# Altium PCB PCB1.PcbDoc (part 1 of 2)
Units mm, origin at the board's own origin, x right, y up, seen from the top; angles counter-clockwise.
Board outline 65.4 x 65.4 mm, 4 copper layers (Top Layer, Internal Plane 1, Signal Layer 1, Bottom Layer), stack 0.778 mm thick; 79 components, 51 nets, 285 pads, 952 vias.
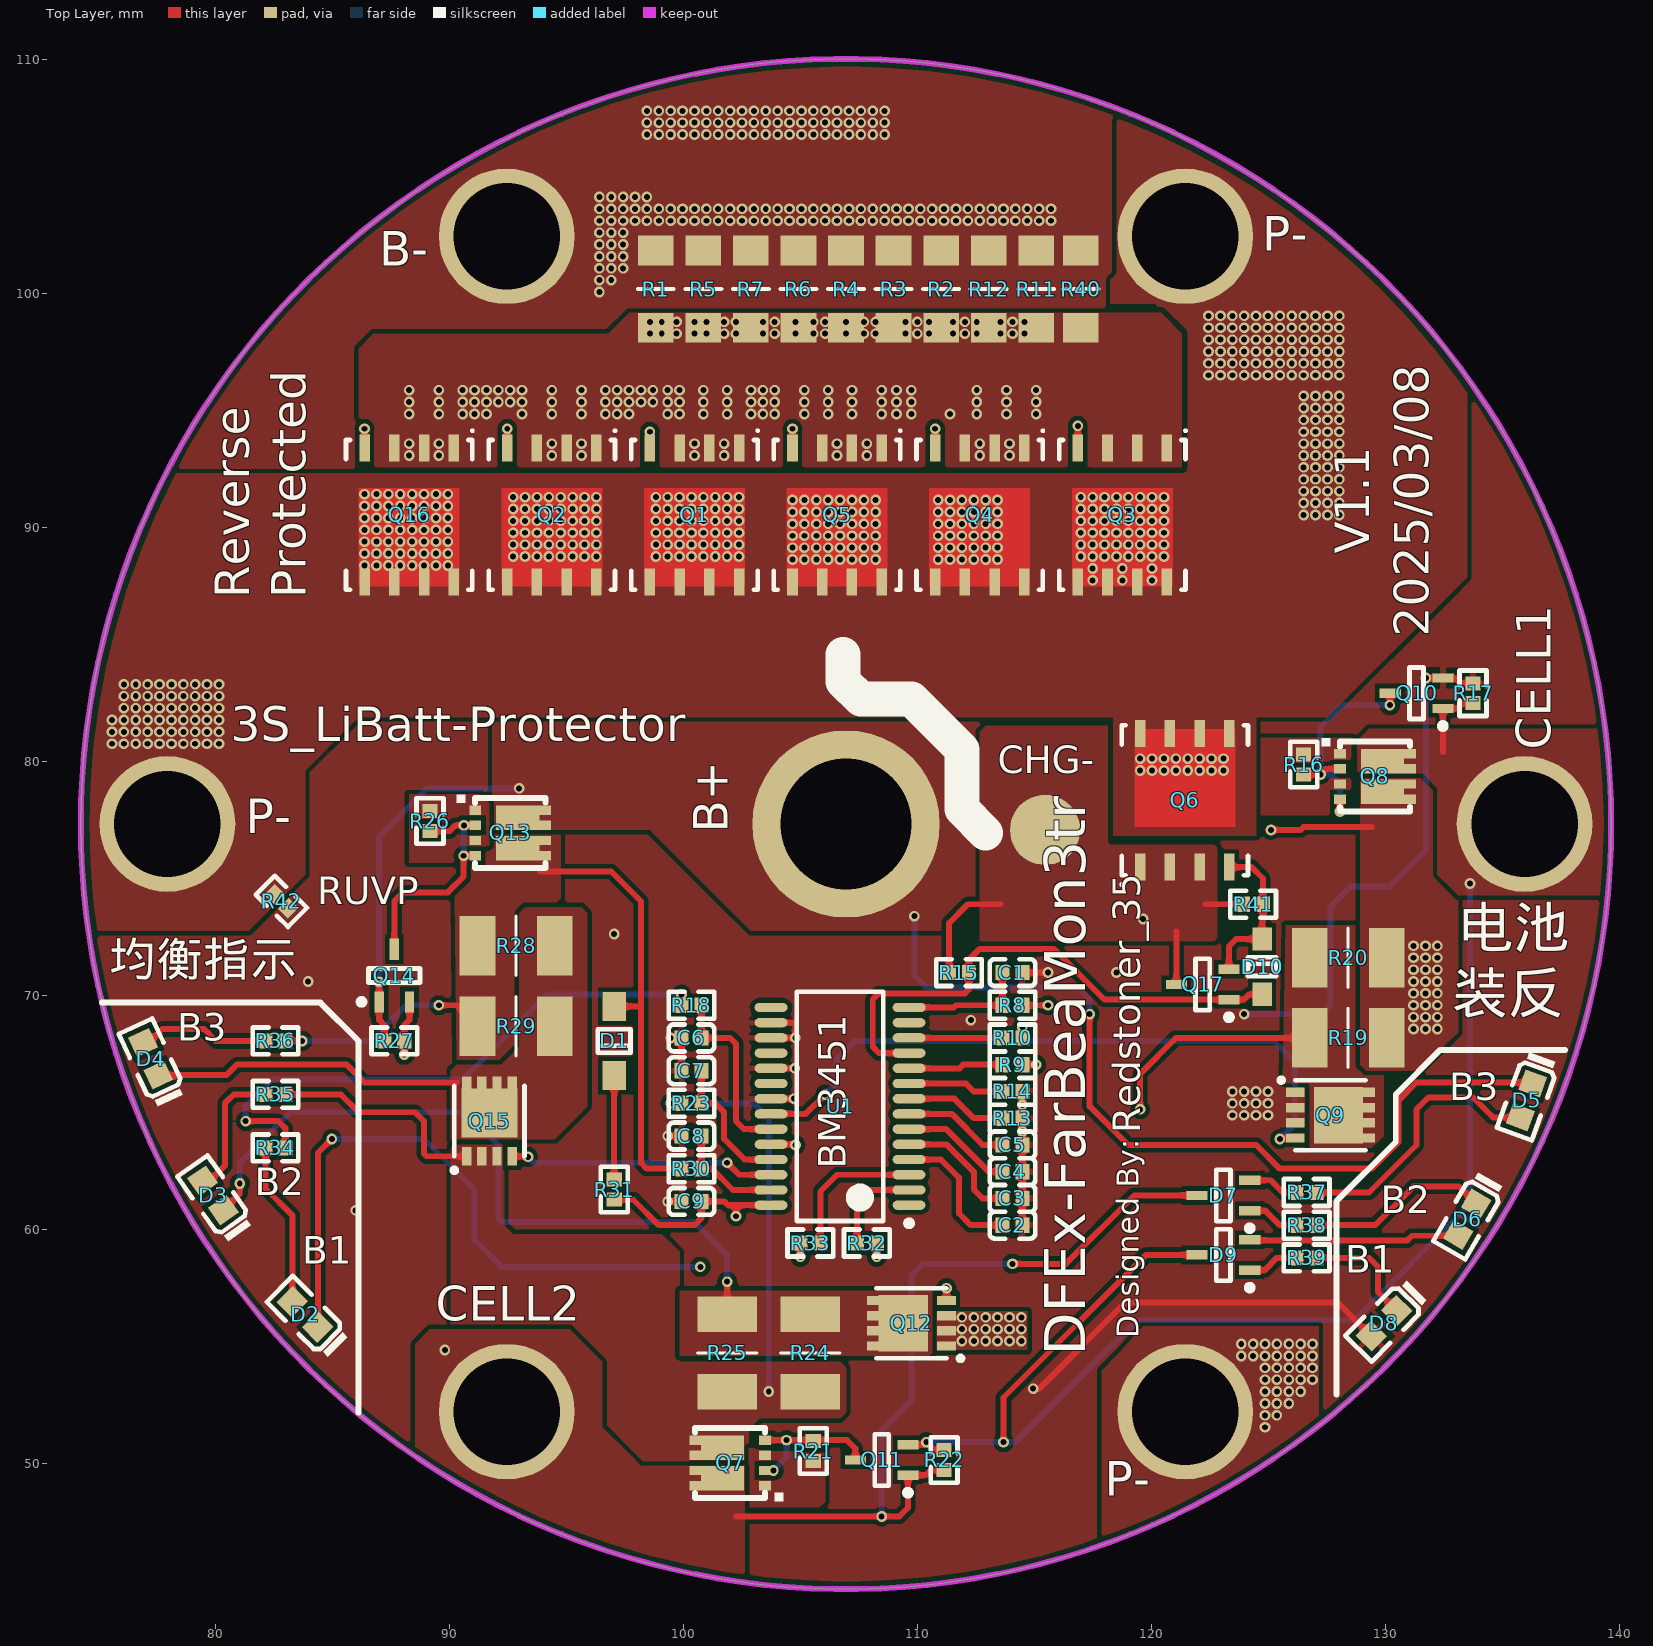
[diagram p0: Top Layer view]
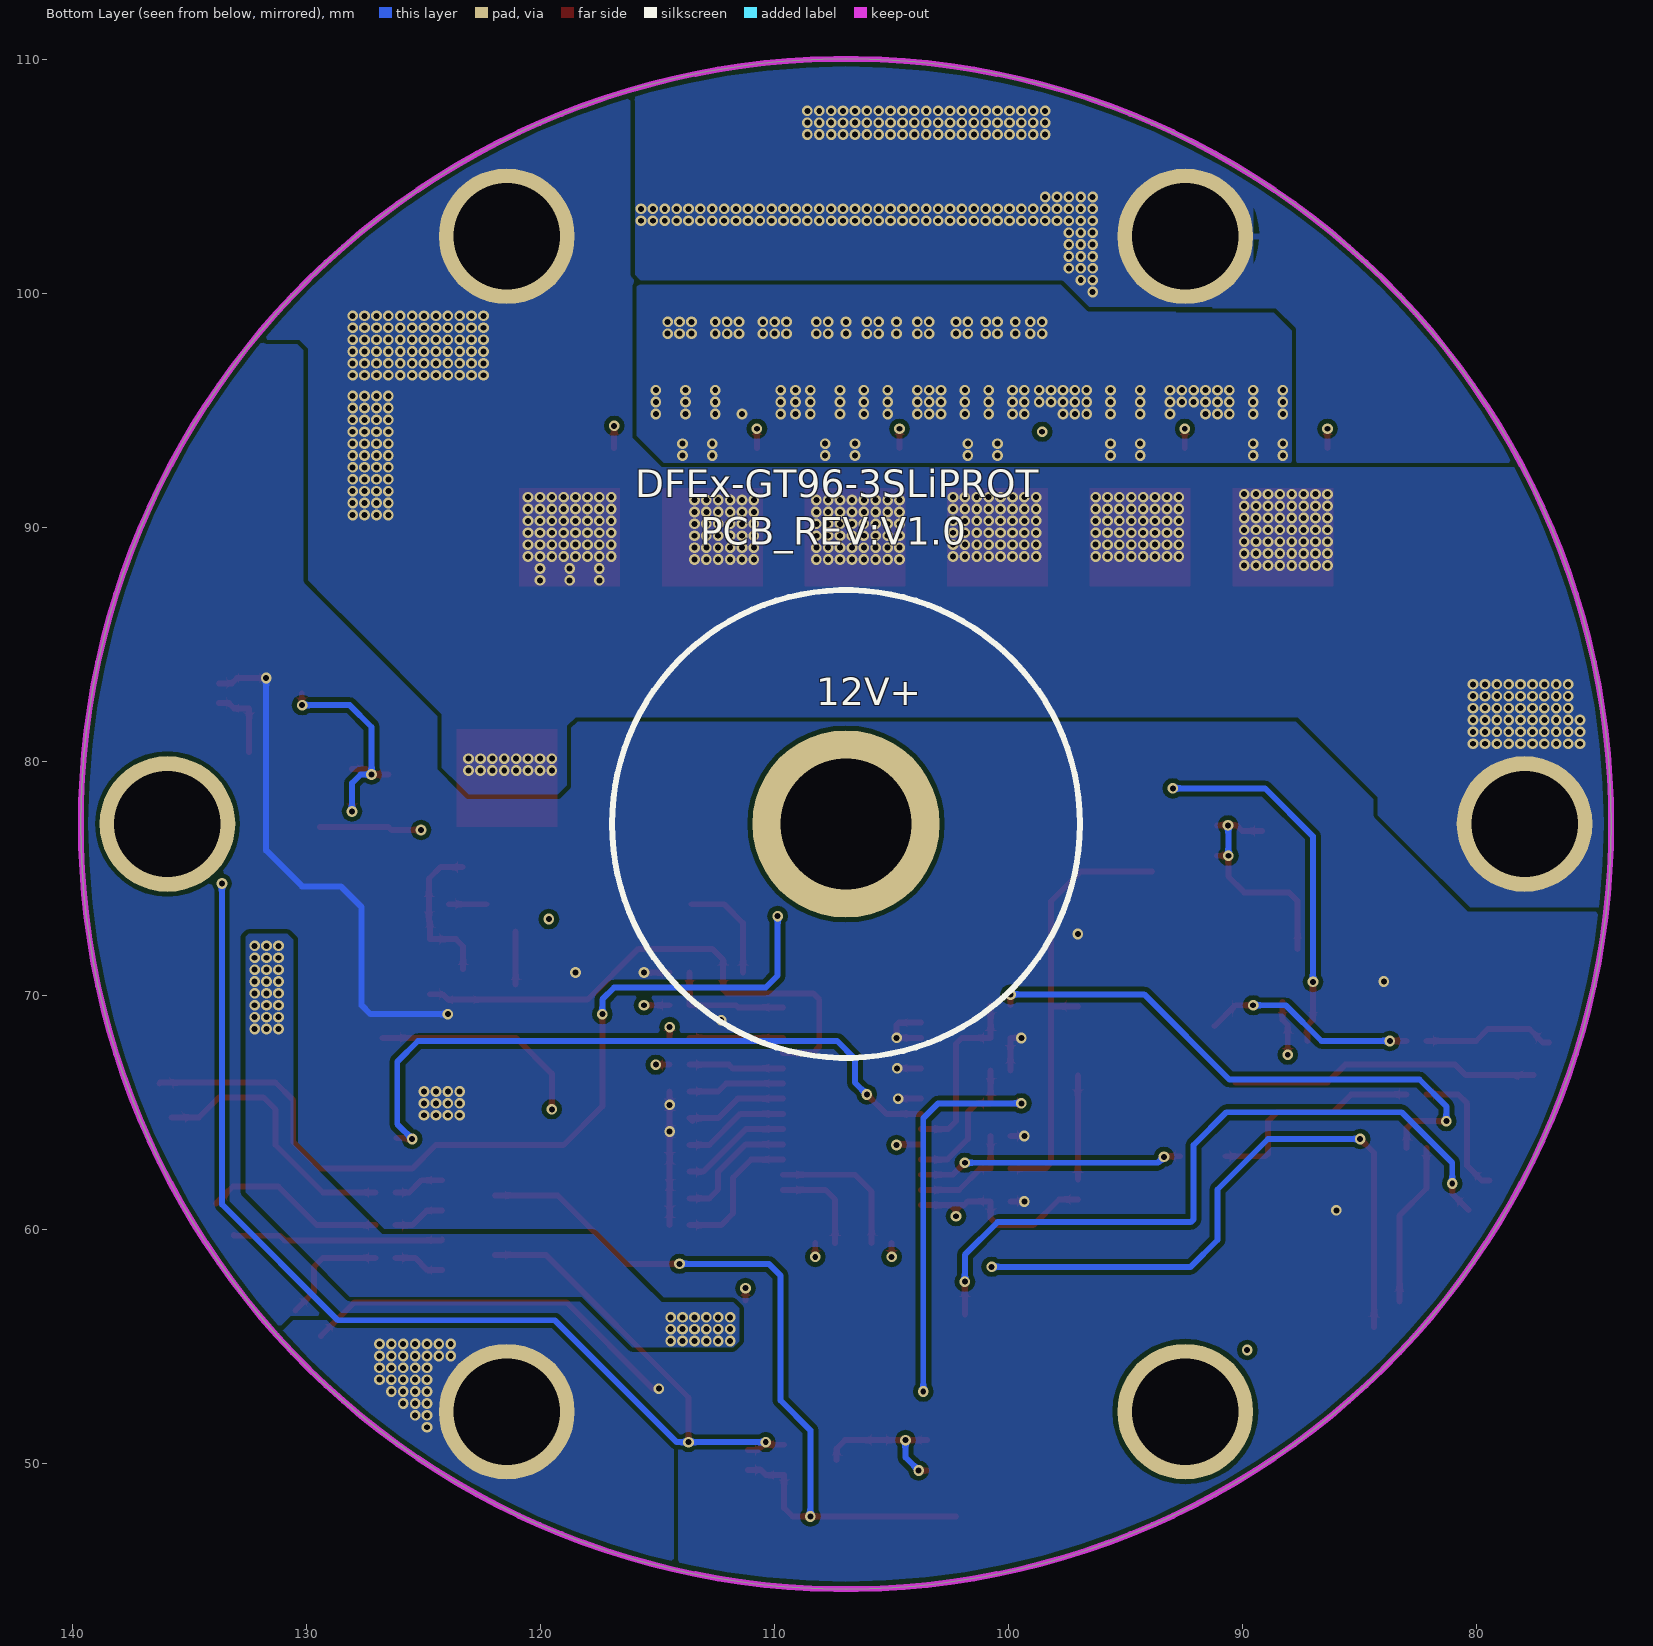
[diagram p1: Bottom Layer view, seen from below]
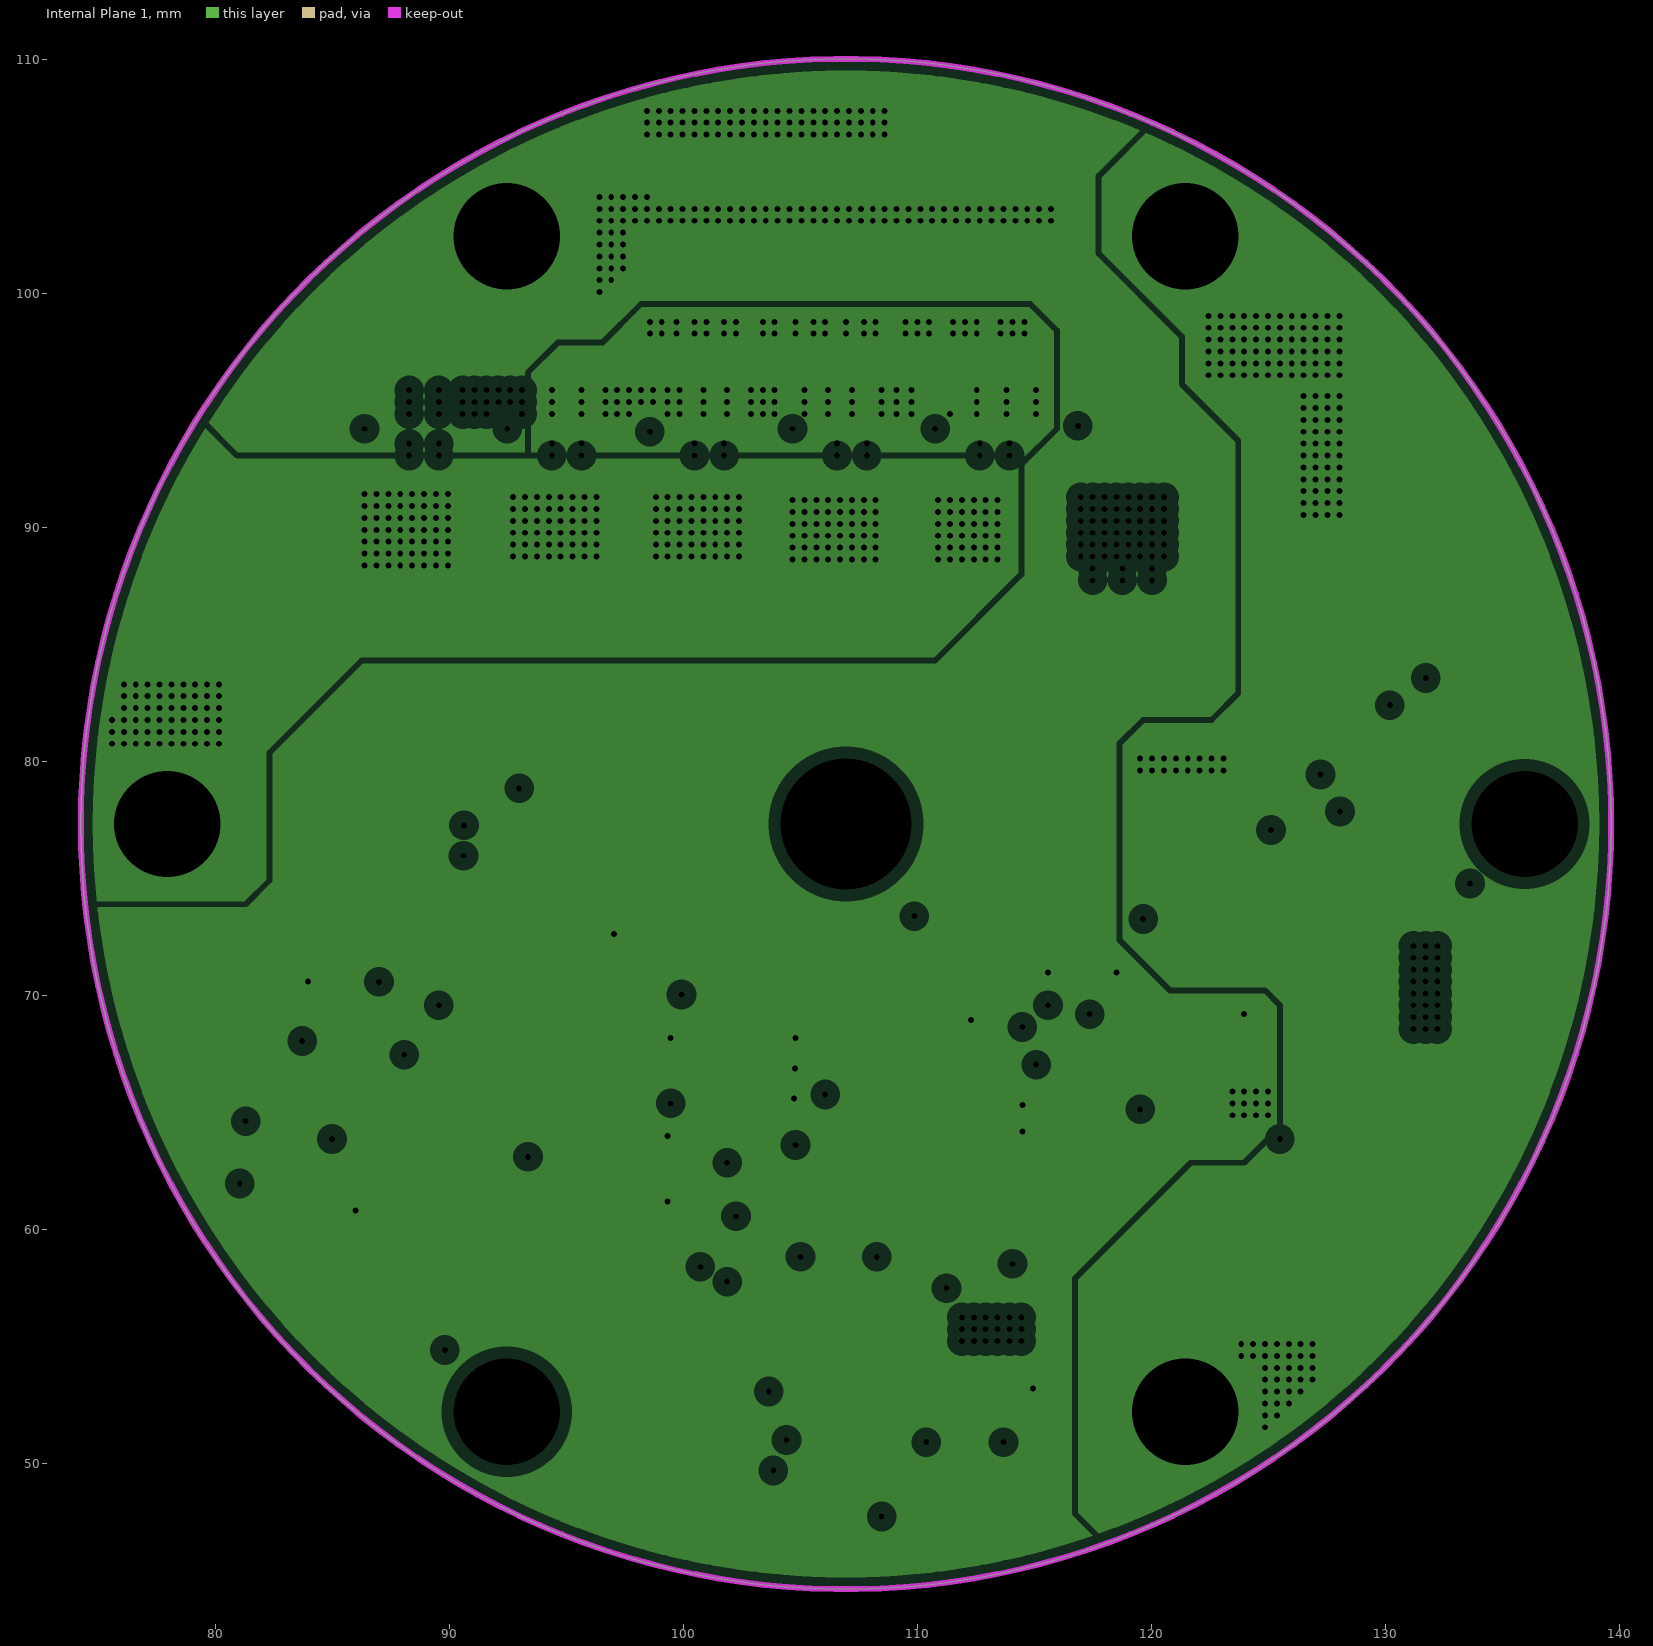
[diagram p2: Internal Plane 1, clearances drawn from the general rule]
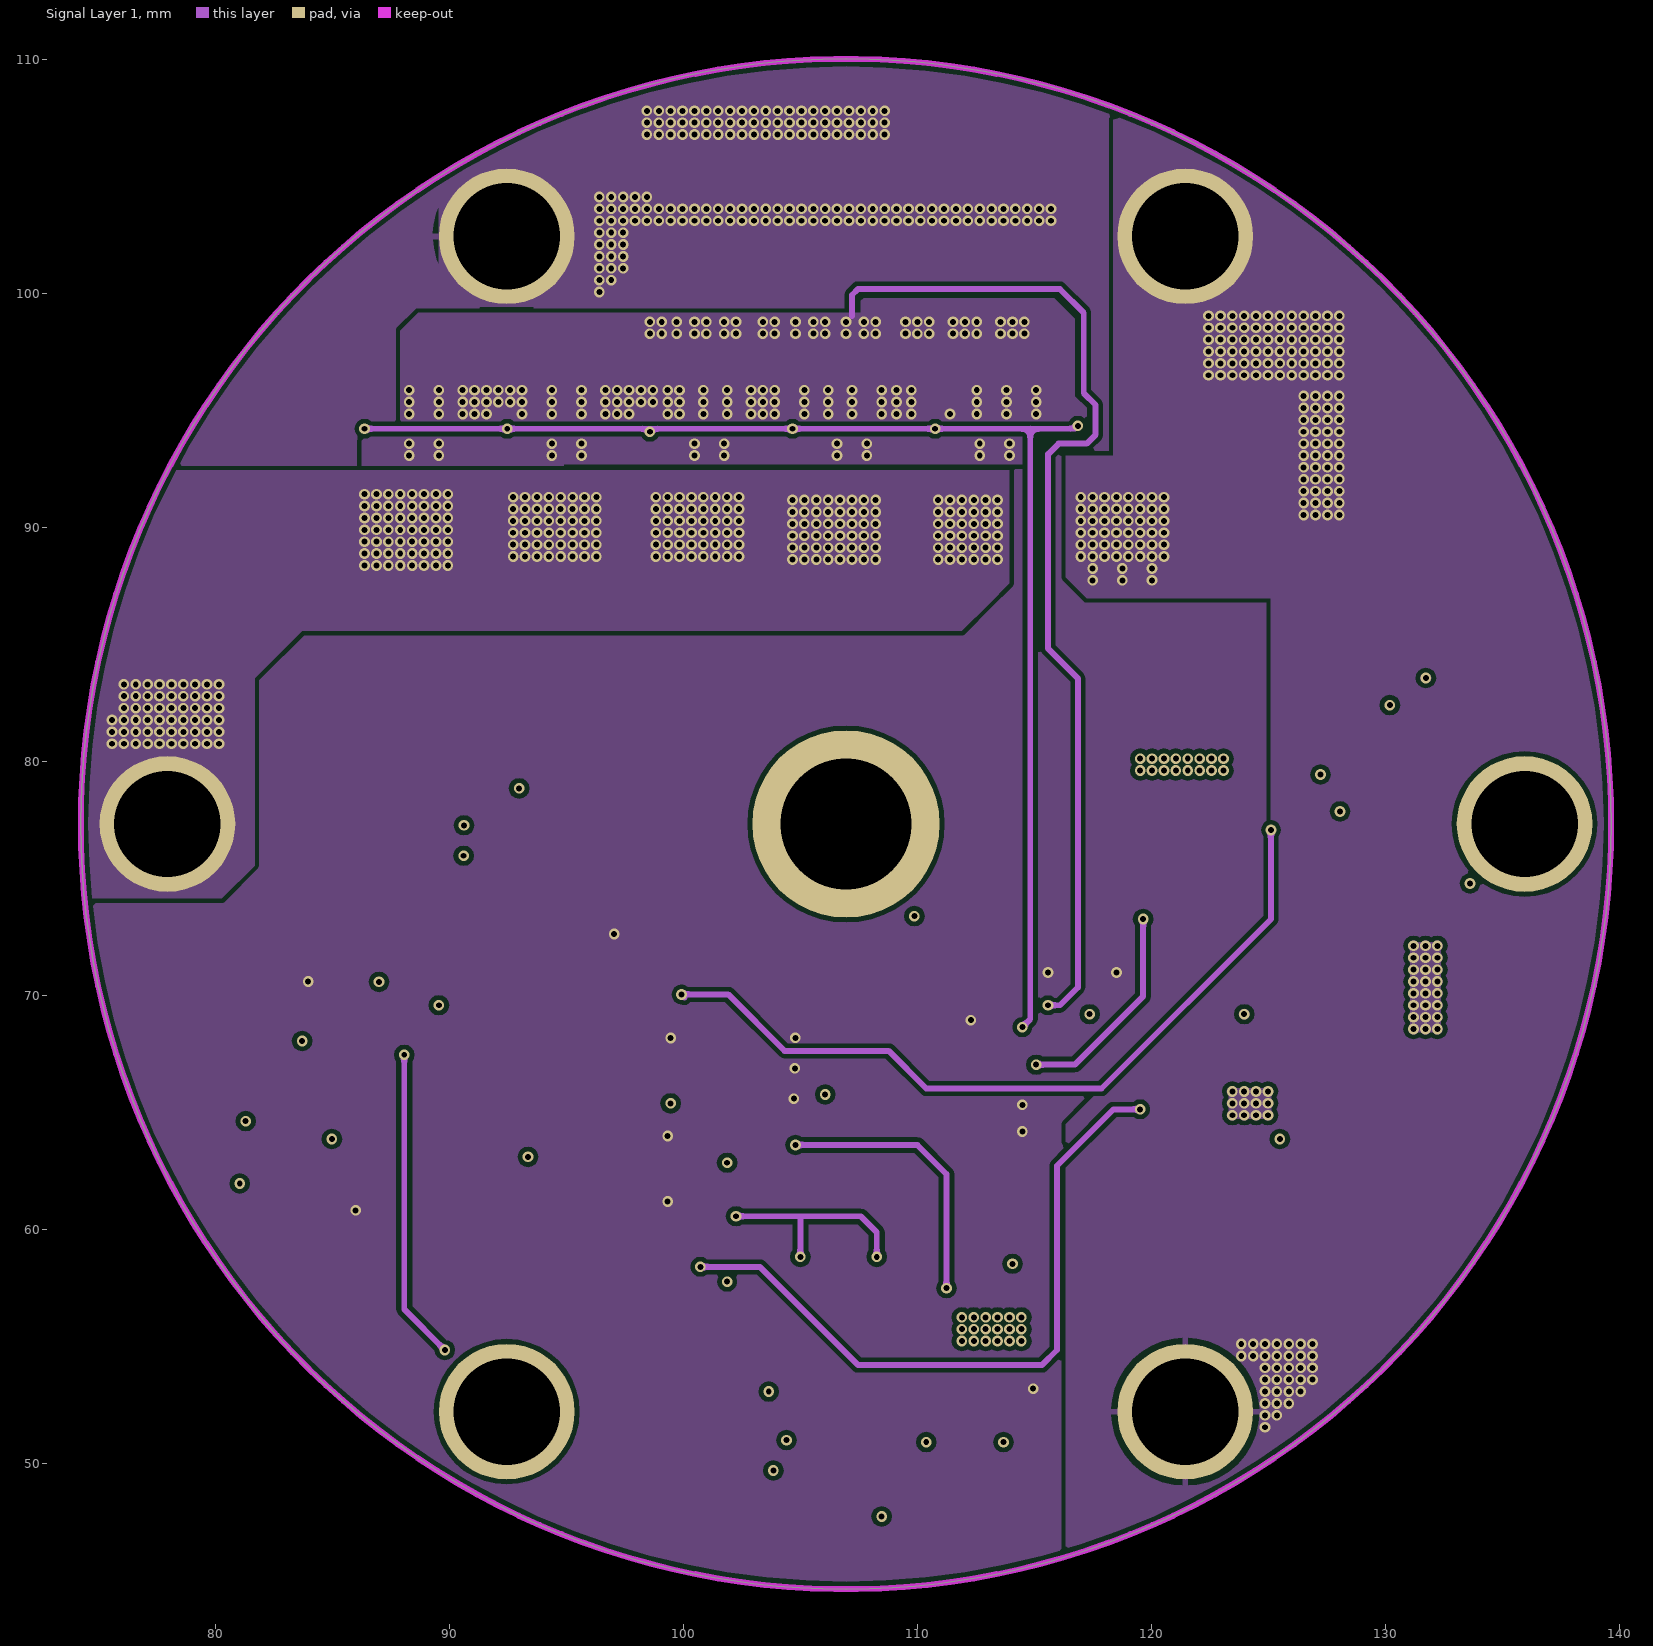
[diagram p3: Signal Layer 1]
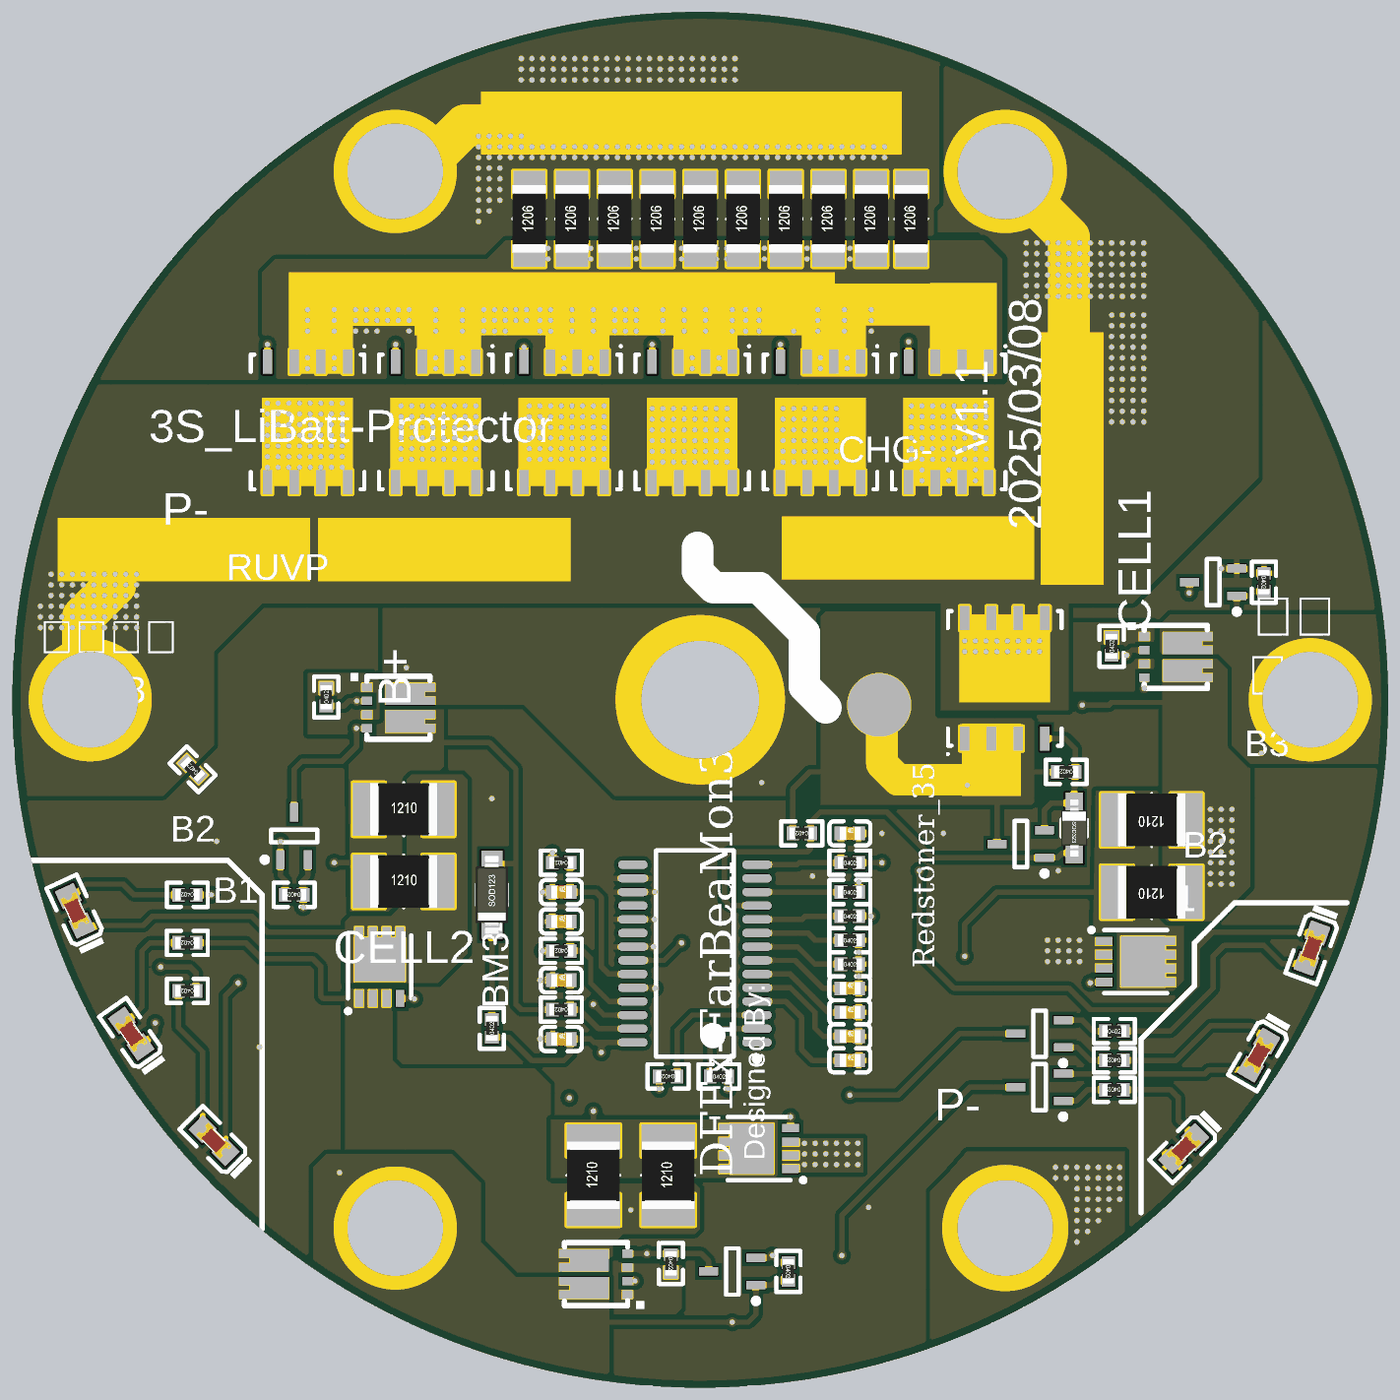
[diagram p5: 3D render of the assembled board from above, using the file's embedded part models]

## Layer stack, top to bottom
Top Solder: solder mask 0.0102, Solder Resist, Dk 3.5
Top Layer: signal copper 0.0356
Dielectric 1: core 0.254, FR-4, Dk 4.2
Internal Plane 1: plane copper 0.036
Dielectric 3: prepreg 0.127, Dk 4.2
Signal Layer 1: signal copper 0.036
Dielectric 2: core 0.254, Dk 4.2
Bottom Layer: signal copper 0.0356
Bottom Solder: solder mask 0.0102, Solder Resist, Dk 3.5

## Board outline
74.234,77.343 ccw(c106.934,77.343) 106.934,44.643 ccw(c106.934,77.343) 139.634,77.343 ccw(c106.934,77.343) 106.934,110.043 ccw(c106.934,77.343)

## Design rules (kind name [scope] priority, off if disabled: settings)
Clearance [All] p1: gap=0.198
PlaneClearance [All] p1: clearance=0.508
PlaneConnect [All] p1: planeconnectstyle=Direct reliefexpansion=0.508 reliefentries=4 reliefconductorwidth=0.254 reliefairgap=0.254
PolygonConnect PolygonConnect_1 [IsVia] p1: connectstyle=Direct reliefconductorwidth=0.254 reliefentries=4 polygonreliefangle="90 Angle" airgapwidth=0.254
PolygonConnect [All] p2: connectstyle=Relief reliefconductorwidth=0.254 reliefentries=4 polygonreliefangle="90 Angle" airgapwidth=0.254
RoomDefinition main [InComponentClass('main')] p1: confinementstyle=ConfineIn formatcopy=TRUE lockcomponents=FALSE outline 178.943,26.924 277.241,26.924 277.241,40.259 178.943,40.259
RoutingVias [All] p1: holewidth=0.711 width=1.27 viastyle="Through Hole" minholewidth=0.711 minwidth=1.27 maxholewidth=0.711 maxwidth=1.27
SolderMaskExpansion [All] p1: expansion=0.102
Width [All] p1: maxlimit=50.8 minlimit=0.178 preferedwidth=0.254
28 further rules are at their usual default settings.

## Components (designator, comment, footprint, x,y, rotation, side; value= is the part's Value field where it differs from the comment)
C1 "10nF (103) 10% 50V" 0402_C 114.046,70.993 r0 top
C2 "100nF (104) 10% 16V" 0402_C 114.046,60.198 r0 top
C3 "100nF (104) 10% 16V" 0402_C 114.046,61.341 r0 top
C4 "100nF (104) 10% 16V" 0402_C 114.046,62.484 r0 top
C5 "100nF (104) 10% 16V" 0402_C 114.046,63.627 r0 top
C6 "1.0uF (105) 10% 25V" 0402_C 100.33,68.199 r0 top
C7 "1.0uF (105) 10% 25V" 0402_C 100.33,66.802 r0 top
C8 "1.0uF (105) 10% 25V" 0402_C 100.33,64.008 r0 top
C9 "2.2uF (225) 10% 25V" 0402_C 100.33,61.214 r0 top
D1 "B5819W  SL" SOD-123 97.028,68.072 r90 top
D2 "绿灯 0603" 0603_LED_S1 83.82,56.388 r135 top
D3 "绿灯 0603" 0603_LED_S1 79.883,61.468 r125 top
D4 "绿灯 0603" 0603_LED_S1 77.216,67.31 r115 top
D5 "红灯 0603" 0603_LED_S1 136.017,65.532 r250 top
D6 "红灯 0603" 0603_LED_S1 133.477,60.452 r240 top
D7 "BAV99W" SC70-3 123.063,61.468 r180 top
D8 "红灯 0603" 0603_LED_S1 129.921,56.007 r225 top
D9 "BAV99W" SC70-3 123.063,58.928 r180 top
D10 "1N5819WS S4" SOD-323 124.714,71.247 r270 top
Q1 "BSC004NE2LS5I" SON/DFN5x6(MOS) 100.457,90.551 r270 top
Q2 "BSC004NE2LS5I" SON/DFN5x6(MOS) 94.361,90.551 r270 top
Q3 "BSC004NE2LS5I" SON/DFN5x6(MOS) 118.745,90.551 r270 top
Q4 "BSC004NE2LS5I" SON/DFN5x6(MOS) 112.649,90.551 r270 top
Q5 "BSC004NE2LS5I" SON/DFN5x6(MOS) 106.553,90.551 r270 top
Q6 "IAUC120N04S6L005ATMA1" SON/DFN5x6(MOS) 121.412,78.359 r90 top
Q7 "XPX30V02" EDFN3x3 101.981,50.038 r90 top
Q8 "XPX30V02" EDFN3x3 129.54,79.375 r270 top
Q9 "WSD3050DN" DFN-8_L3.0-W3.0-P0.65-BL 127.635,64.897 r270 top
Q10 "2N7002KW" SC70-3 131.318,82.931 r180 top
Q11 "2N7002KW" SC70-3 108.458,50.165 r180 top
Q12 "WSD3050DN" DFN-8_L3.0-W3.0-P0.65-BL 109.728,56.007 r90 top
Q13 "XPX30V02" EDFN3x3 92.583,76.962 r270 top
Q14 "2N7002KW" SC70-3 87.63,70.866 r90 top
Q15 "WSD3050DN" DFN-8_L3.0-W3.0-P0.65-BL 91.694,64.643 r0 top
Q16 "BSC004NE2LS5I" SON/DFN5x6(MOS) 88.265,90.551 r270 top
Q17 "BSS84PW" SC70-3 122.174,70.485 r180 top
R1 "R008" 1206R 98.806,100.203 r90 top
R2 "R008" 1206R 110.998,100.203 r90 top
R3 "R008" 1206R 108.966,100.203 r90 top
R4 "R008" 1206R 106.934,100.203 r90 top
R5 "R008" 1206R 100.838,100.203 r90 top
R6 "R008" 1206R 104.902,100.203 r90 top
R7 "R008" 1206R 102.87,100.203 r90 top
R8 "2KΩ (2001) ±1%" 0402_R 114.046,69.596 r0 top
R9 "220KΩ (2203) ±1%" 0402_R 114.046,67.056 r0 top
R10 "1Ω (1R00) ±1%" 0402_R 114.046,68.199 r0 top
R11 "R008" 1206R 115.062,100.203 r90 top
R12 "R008" 1206R 113.03,100.203 r90 top
R13 "SDNT1005X104F4250FTF" 0402_R 114.046,64.77 r0 top
R14 "40.2KΩ (4022) ±1%" 0402_R 114.046,65.913 r0 top
R15 "5.6MΩ (5604) ±1%" 0402_R 111.76,70.993 r180 top
R16 "470KΩ (4702) ±1%" 0402_R 126.492,79.883 r90 top
R17 "470KΩ (4703) ±1%" 0402_R 133.731,82.931 r270 top
R18 "1KΩ (1001) ±1%" 0402_R 100.33,69.596 r180 top
R19 "22R" 1210R 128.397,68.199 r180 top
R20 "22R" 1210R 128.397,71.628 r180 top
R21 "470KΩ (4703) ±1%" 0402_R 105.537,50.546 r270 top
R22 "470KΩ (4703) ±1%" 0402_R 111.125,50.165 r270 top
R23 "1KΩ (1001) ±1%" 0402_R 100.33,65.405 r180 top
R24 "22R" 1210R 105.41,54.737 r90 top
R25 "22R" 1210R 101.854,54.737 r90 top
R26 "470KΩ (4703) ±1%" 0402_R 89.154,77.47 r90 top
R27 "470KΩ (4703) ±1%" 0402_R 87.63,68.072 r180 top
R28 "22R" 1210R 92.837,72.136 r0 top
R29 "22R" 1210R 92.837,68.707 r0 top
R30 "1KΩ (1001) ±1%" 0402_R 100.33,62.611 r180 top
R31 "1KΩ (1001) ±1%" 0402_R 97.028,61.722 r90 top
R32 "1KΩ (1001) ±1%" 0402_R 107.823,59.436 r0 top
R33 "1KΩ (1001) ±1%" 0402_R 105.41,59.436 r180 top
R34 "1KΩ (1001) ±1%" 0402_R 82.55,63.5 r180 top
R35 "1KΩ (1001) ±1%" 0402_R 82.55,65.786 r180 top
R36 "1KΩ (1001) ±1%" 0402_R 82.55,68.072 r180 top
R37 "1KΩ (1001) ±1%" 0402_R 126.619,61.595 r0 top
R38 "1KΩ (1001) ±1%" 0402_R 126.619,60.198 r180 top
R39 "1KΩ (1001) ±1%" 0402_R 126.619,58.801 r180 top
R40 "R008" 1206R 116.967,100.203 r90 top
R41 "5.6MΩ (5604) ±1%" 0402_R 124.333,73.914 r180 top
R42 "10MΩ (1005) ±1%" 0402_R 82.804,74.041 r135 top
U1 "BM3451VJDC-T28A" TSSOP28-BM3451 106.68,65.278 r180 top

## Footprints (in the part's own frame and the unit in brackets; to place one, negate y for a bottom-side part, rotate by r counter-clockwise, add the part's x,y. Pads: shape width x height; smd on the part's side, far side on the other; paste and mask are expansions set on the pad)
0402_C [mm]
  rect 0.6x0.65 smd mask+0.051: 1(-0.425,0) 2(0.425,0)
  silkscreen extent -0.97,-0.58 0.97,0.58, body extent -0.48,-0.3 0.52,0.3, height 0.2
0402_R [mm]
  rect 0.6x0.65 smd mask+0.051: 1(-0.425,0) 2(0.425,0)
  silkscreen extent -0.97,-0.58 0.97,0.58, body extent -0.57,-0.27 0.58,0.28, height 0.41
0603_LED_S1 [mm]
  rect 0.93x0.98 smd: A(0.77,0) K(-0.77,0)
  silkscreen extent -1.98,-0.79 1.54,0.79, body extent -0.8,-0.4 0.8,0.4, height 0.6
1206R [mil]
  rect 50x60 smd: 1(-65,0) 2(65,0)
  silkscreen extent 0,-30 0,30, body extent -63,-31 63,31, height 24
1210R [mil]
  rect 60x100 smd: 1(-65,0) 2(65,0)
  silkscreen extent 0,-50 0,50, body extent -63,-49 63,49, height 24
DFN-8_L3.0-W3.0-P0.65-BL [mm]
  rect 0.4x0.8 smd paste-100 mask+0.051: 1(-0.975,-1.5) 2(-0.325,-1.5) 3(0.325,-1.5) 4(0.975,-1.5) 5(0.975,1.5) 6(0.325,1.5) 7(-0.325,1.5) 8(-0.975,1.5)
  rect 2.4x2.1 smd paste-100 mask+0.051: 8(0,0.35)
  silkscreen extent -1.6,-2.2 1.5,1.5, body extent -1.52,-1.52 1.52,1.52, height 1.2
EDFN3x3 [mm] "Package for EMF20B02V, Dual Drain DFN3x3"
  rect 0.4x0.5 smd mask+0.03: 1(-0.975,-1.494) 2(-0.325,-1.494) 3(0.325,-1.494) 4(0.975,-1.494) 5(0.325,1.494) 5(0.975,1.494) 6(-0.975,1.494) 6(-0.325,1.494)
  rect 1.05x1.85 smd mask+0.03: 5(0.65,0.321) 6(-0.65,0.321)
  silkscreen extent -1.65,-2.29 1.5,1.5, body extent -1.52,-1.52 1.52,1.52, height 0.9
SC70-3 [mm] "3 Lead SC70(SOT-323) package for small Transistor"
  rect 0.9x0.4 smd mask+0.05: 1(-1.125,0.65) 2(-1.125,-0.65) 3(1.125,0)
  silkscreen extent -1.25,-1.1 0.3,1.52, body extent -0.67,-1.1 0.67,1.1, height 1.1
SOD-123 [mm]
  rect 1.25x1 smd: 1(1.475,0) 2(-1.475,0)
  silkscreen extent -0.5,-0.7 0.5,0.7, body extent -1.85,-0.77 1.85,0.78, height 1.35
SOD-323 [mm]
  rect 1x0.83 smd: 1(1.18,0) 2(-1.18,0)
  silkscreen extent -0.4,-0.6 0.4,0.6, body extent -1.35,-0.62 1.35,0.63, height 1.1
SON/DFN5x6(MOS) [mm] "SON, 8-Leads, Body 5.00x6.00mm, Pitch 1.27mm, Thermal Pad 4.00x3.53mm, IPC Low Density"
  rect 1.15x0.45 smd: 1(-2.86,1.905) 2(-2.86,0.635) 3(-2.86,-0.635) 4(-2.86,-1.905) 5(2.86,-1.905) 6(2.86,-0.635) 7(2.86,0.635) 8(2.86,1.905)
  Top Layer region: -1.143,-2.159 3.048,-2.159 3.048,2.159 -1.143,2.159
  silkscreen extent -3.65,-2.7 3.2,2.75, body extent -3.05,-2.55 3.05,2.55, height 1.05
TSSOP28-BM3451 [mm] "TSOP, 28-Leads, Body 9.70x4.40mm, Pitch 0.65mm, IPC Medium Density"
  oval 1.4x0.4 smd mask+0.03: 1(-2.95,4.225) 2(-2.95,3.575) 3(-2.95,2.925) 4(-2.95,2.275) 5(-2.95,1.625) 6(-2.95,0.975) 7(-2.95,0.325) 8(-2.95,-0.325) 9(-2.95,-0.975) 10(-2.95,-1.625) 11(-2.95,-2.275) 12(-2.95,-2.925) 13(-2.95,-3.575) 14(-2.95,-4.225) 15(2.95,-4.225) 16(2.95,-3.575) 17(2.95,-2.925) 18(2.95,-2.275) 19(2.95,-1.625) 20(2.95,-0.975) 21(2.95,-0.325) 22(2.95,0.325) 23(2.95,0.975) 24(2.95,1.625) 25(2.95,2.275) 26(2.95,2.925) 27(2.95,3.575) 28(2.95,4.225)
  silkscreen extent -3.08,-4.9 1.85,5.12, body extent -2.25,-4.9 2.25,4.9, height 1.2

## Part data
C1: library part "0402 10nF (103) 10% 50V", "贴片电容"
C2 C3 C4 C5: library part "0402 100nF (104) 10% 16V", "贴片电容"
C6 C7 C8: library part "0402 1.0uF (105) 10% 25V", "贴片电容"
C9: library part "0402 2.2nF (222) 10% 50V", "贴片电容"
D1: library part "SOD-123 B5819W  SL", "肖特基二极管"
D2 D3 D4: library part "0603 绿灯", "发光二极管"
D5 D6 D8: library part "0603 红灯", "发光二极管"
D7 D9: library part "SOT-23 BAV99 A7W", "开关二极管"
D10: library part "SOD-323 1N4148WS T4", "二极管"
Q1 Q2 Q3 Q4 Q5 Q16: library part "SON/DFN5x6 MOS", "0.4mR OptiMOS 5 MOSFET"
Q6: library part "SON/DFN5x6 MOS", "0.5mR 120A OptiMOS 6 Automotive grade MOSFET,SSO8(5x6) Package"
Q7 Q8 Q13: library part XPX10H03RX, "双N沟道MOSFET, DFN3x3 30V 40A 10mΩ"
Q9 Q12 Q15: library part "SON/DFN5x6 MOS", "PDFN3x3 20V 50A 5.8mΩ N-Ch MOSFET"
Q10 Q11 Q14: library part "2N7002 7002", "单N沟道MOSFET(场效应管)"
Q17: library part SI2301CDS-T1-GE3, "MOS(场效应管)"
R1 R2 R3 R4 R5 R6 R7 R11 R12 R19 R20 R24 R25 R28 R29 R40: library part Res, "Resistor"
R8: library part "0402 2KΩ (2001) 1%", "贴片电阻"
R9: library part "0402 220KΩ (2203) 1%", "贴片电阻"
R10: library part "0402 1Ω (1R00) 1%", "贴片电阻"
R13: library part "0402 100KΩ (1003) 1%", "贴片NTC热敏电阻 100KΩ (1003) ±1% B4250"
R14: library part "0402 56KΩ (5602) 1%", "贴片电阻"
R15 R41: library part "0402 1MΩ (1004) 1%", "贴片电阻"
R16: library part "0402 20KΩ (2002) 1%", "贴片电阻"
R17 R21 R22 R26 R27: library part "0402 470KΩ (4703) 1%", "贴片电阻"
R18 R23 R30 R31 R32 R33 R34 R35 R36 R37 R38 R39: library part "0402 1KΩ (1001) 1%", "贴片电阻"
R42: library part "0402 10MΩ (1005) 1%", "贴片电阻"
U1: library part BM3451-T28A, "2-5串全功能锂电池保护IC，支持级联功能"

## Free pads (board coordinates)
  round 5.8 hole 4.55 mask+0.03: 0(77.934,77.343) 0(92.434,52.228) 0(92.434,102.458) 0(121.434,102.458) 0(135.934,77.343)
  round 5.8 hole 4.55: 0(121.434,52.228)
  round 8 hole 5.6 mask+0.03: 2(106.934,77.343)
  round 3 smd mask+0.03: 7(115.443,77.089)

## Via types
v1: diameter 0.457, hole 0.254, Top Layer to Bottom Layer, tented both sides, 952 vias

## Nets (pads, with @x,y where several pads share a name; then routed paths per layer and width w, separated by ;. In a path a pad name is that pad's centre, name@x,y a point inside that pad or via, vN(x,y) a via of type N, cw(c..) or ccw(c..) an arc to the next point about the centre after c; other vN are vias at no path point)
3V7: Q8.5 Q12.1 Q12.2 Q12.3 R18.2 R19.1 R20.1 R34.1 | length 62.6
  Top Layer w0.254: v1(81.28,64.643) 82.677,64.643 82.975,64.345 R34.1@82.975,63.5 ; R18.2@99.905,69.596 v1(99.905,70.06) ; v1(125.095,77.089) 126.365,77.089 126.492,77.216 129.413,77.216
  Signal Layer 1 w0.254: v1@100.03,69.935 v1(99.905,70.06) 101.898,70.06 104.309,67.649 108.754,67.649 110.363,66.04 117.856,66.04 125.095,73.279 v1(125.095,77.089)
  Bottom Layer w0.254: v1(81.28,64.643) 81.28,65.278 82.423,66.421 90.551,66.421 94.19,70.06 v1(99.905,70.06)
  other v1: 111.887,55.245 112.395,55.245 112.903,55.245 113.411,55.245 113.919,55.245 114.427,55.245 111.887,55.753 112.395,55.753 112.903,55.753 113.411,55.753 113.919,55.753 114.427,55.753 111.887,56.261 112.395,56.261 112.903,56.261 113.411,56.261 113.919,56.261 114.427,56.261 131.191,68.58 131.699,68.58 132.207,68.58 131.191,69.088 131.699,69.088 132.207,69.088 131.191,69.596 131.699,69.596 132.207,69.596 131.191,70.104 131.699,70.104 132.207,70.104 131.191,70.612 131.699,70.612 132.207,70.612 131.191,71.12 131.699,71.12 132.207,71.12 131.191,71.628 131.699,71.628 132.207,71.628 131.191,72.136 131.699,72.136 132.207,72.136
3V7BAL: D2.K Q9.5 Q9.6 Q9.7 Q9.8 R19.2 R20.2 | length 66.6
  Top Layer w0.254: D2.K@84.364,55.844 84.364,63.282 v1(84.963,63.881) ; v1(119.507,65.151) 119.507,66.675 121.031,68.199 R19.2@126.746,68.199
  Signal Layer 1 w0.254: v1(100.711,58.42) 103.251,58.42 107.442,54.229 115.316,54.229 115.951,54.864 115.951,62.738 118.364,65.151 v1(119.507,65.151)
  Bottom Layer w0.254: v1(84.963,63.881) 88.9,63.881 91.059,61.722 91.059,59.563 92.202,58.42 v1(100.711,58.42)
7V4: Q7.5 Q15.1 Q15.2 Q15.3 R23.2 R24.1 R25.1 R35.1 | length 26.3
  Top Layer w0.254: R35.1@82.975,65.786 85.344,65.786 86.106,65.024 88.519,65.024 88.9,64.643 88.9,63.246 89.003,63.143 Q15.1@90.719,63.143 ; v1(99.441,65.405) R23.2@99.905,65.405
  Bottom Layer w0.254: v1(99.441,65.405) 102.997,65.405 103.632,64.77 v1(103.632,53.086)
7V4BAL: D3.K Q12.5 Q12.6 Q12.7 Q12.8 R24.2 R25.2 | length 31
  Top Layer w0.254: D3.K@80.325,60.837 81.026,61.539 v1(81.026,61.976) ; R25.2@101.854,56.388 v1(101.854,57.785)
  Bottom Layer w0.254: v1(81.026,61.976) 81.026,62.865 83.185,65.024 90.678,65.024 92.075,63.627 92.075,60.452 92.202,60.325 100.457,60.325 101.854,58.928 v1(101.854,57.785)
12V: D5.K pad.2 Q13.6 Q14.1 R27.2 | length 53.3
  Top Layer w0.254: v1(86.98,70.597) Q14.1@86.98,69.741 86.98,68.976 87.205,68.751 R27.2@87.205,68.072 ; v1(117.348,69.215) 117.348,65.278 118.999,63.627 124.46,63.627 125.476,62.611 129.413,62.611 130.556,63.754 130.556,65.532 131.318,66.294 136.242,66.294 D5.K@136.28,66.256
  Bottom Layer w0.254: v1(86.98,70.597) 86.98,76.82 89.027,78.867 v1(92.964,78.867) ; v1(109.855,73.406) 109.855,70.866 110.363,70.358 116.84,70.358 117.348,69.85 v1(117.348,69.215)
12VBAL: D4.K Q15.5 Q15.6 Q15.7 Q15.8 R28.2 R29.2 | length 13.3
  Top Layer w0.254: D4.K@77.541,66.612 80.455,66.612 80.899,67.056 85.598,67.056 86.36,66.294 90.297,66.294
BAL1: Q9.4 U1.22 | length 28.9
  Top Layer w0.254: U1.22@103.73,64.953 105.212,64.953 v1(106.045,65.786) ; v1(125.476,63.881) 125.517,63.922 Q9.4@126.135,63.922
  Bottom Layer w0.254: v1(106.045,65.786) 106.553,66.294 106.553,67.31 107.315,68.072 125.222,68.072 126.111,67.183 126.111,64.516 v1(125.476,63.881)
BAL2: Q12.4 U1.24 | length 13.4
  Top Layer w0.254: U1.24@103.73,63.653 v1@104.749,63.653 ; Q12.4@111.228,56.982 v1(111.228,57.507)
  Signal Layer 1 w0.254: v1(104.775,63.627) 109.982,63.627 111.228,62.381 v1(111.228,57.507)
BAL3: Q15.4 U1.26 | length 11.4
  Top Layer w0.254: Q15.4@92.669,63.143 93.321,63.143 v1(93.345,63.119) ; v1(101.854,62.865) 102.366,62.353 U1.26@103.73,62.353
  Bottom Layer w0.254: v1(93.345,63.119) 93.599,62.865 v1(101.854,62.865)
BAT-: C1.2 C2.2 C3.2 C4.2 C5.2 C6.1 C7.1 C8.1 C9.1 D8.A pad.0@92.434,102.458 Q9.1 Q9.2 Q9.3 Q10.2 R1.2 R2.2 R3.2 R4.2 R5.2 R6.2 R7.2 R11.2 R12.2 R13.2 R14.2 R17.1 R40.2 R42.1 U1.16 U1.17 U1.19 U1.21 | length 53.7
  Top Layer w0.254: v1(99.314,61.214) C9.1@99.905,61.214 ; v1(99.314,64.008) C8.1@99.905,64.008 ; v1(99.441,68.199) C6.1@99.905,68.199 C7.1@99.905,66.802 ; U1.21@103.73,65.603 v1(104.704,65.603) ; U1.19@103.73,66.903 v1(104.749,66.903) ; U1.17@103.73,68.203 v1(104.771,68.203) 104.771,68.761 104.679,68.853 U1.16@103.73,68.853 ; C2.2@114.471,60.198 C3.2@114.471,61.341 C4.2@114.471,62.484 C5.2@114.471,63.627 R13.2@114.471,64.77 R14.2@114.471,65.913 ; C1.2@114.471,70.993 v1(115.57,70.993) ; v1(114.935,53.213) 115.189,53.213 118.872,56.896 127.943,56.896 D8.A@129.377,55.463 ; v1(131.714,83.581) Q10.2@132.443,83.581 132.954,83.581 133.179,83.356 R17.1@133.731,83.356
  Bottom Layer w0.254: v1(123.952,69.215) 127.254,69.215 127.635,69.596 127.635,73.787 128.524,74.676 130.175,74.676 131.714,76.215 v1(131.714,83.581)
  other v1: 85.979,60.833 114.471,64.199 123.444,64.897 123.952,64.897 124.46,64.897 124.968,64.897 114.471,65.342 123.444,65.405 123.952,65.405 124.46,65.405 124.968,65.405 123.444,65.913 123.952,65.913 124.46,65.913 124.968,65.913 112.268,68.961 83.947,70.612 118.491,70.993 97.028,72.644 96.393,100.076 96.393,100.584 96.901,100.584 96.393,101.092 96.901,101.092 97.409,101.092 96.393,101.6 96.901,101.6 97.409,101.6 96.393,102.108 96.901,102.108 97.409,102.108 96.393,102.616 96.901,102.616 97.409,102.616 96.393,103.124 96.901,103.124 97.409,103.124 97.917,103.124 98.425,103.124 98.933,103.124 99.441,103.124 99.949,103.124 100.457,103.124 100.965,103.124 101.473,103.124 101.981,103.124 102.489,103.124 102.997,103.124 103.505,103.124 104.013,103.124 104.521,103.124 105.029,103.124 105.537,103.124 106.045,103.124 106.553,103.124 107.061,103.124 107.569,103.124 108.077,103.124 108.585,103.124 109.093,103.124 109.601,103.124 110.109,103.124 110.617,103.124 111.125,103.124 111.633,103.124 112.141,103.124 112.649,103.124 113.157,103.124 113.665,103.124 114.173,103.124 114.681,103.124 115.189,103.124 115.697,103.124 96.393,103.632 96.901,103.632 97.409,103.632 97.917,103.632 98.425,103.632 98.933,103.632 99.441,103.632 99.949,103.632 100.457,103.632 100.965,103.632 101.473,103.632 101.981,103.632 102.489,103.632 102.997,103.632 103.505,103.632 104.013,103.632 104.521,103.632 105.029,103.632 105.537,103.632 106.045,103.632 106.553,103.632 107.061,103.632 107.569,103.632 108.077,103.632 108.585,103.632 109.093,103.632 109.601,103.632 110.109,103.632 110.617,103.632 111.125,103.632 111.633,103.632 112.141,103.632 112.649,103.632 113.157,103.632 113.665,103.632 114.173,103.632 114.681,103.632 115.189,103.632 115.697,103.632 96.393,104.14 96.901,104.14 97.409,104.14 97.917,104.14 98.425,104.14 98.425,106.807 98.933,106.807 99.441,106.807 99.949,106.807 100.457,106.807 100.965,106.807 101.473,106.807 101.981,106.807 102.489,106.807 102.997,106.807 103.505,106.807 104.013,106.807 104.521,106.807 105.029,106.807 105.537,106.807 106.045,106.807 106.553,106.807 107.061,106.807 107.569,106.807 108.077,106.807 108.585,106.807 98.425,107.315 98.933,107.315 99.441,107.315 99.949,107.315 100.457,107.315 100.965,107.315 101.473,107.315 101.981,107.315 102.489,107.315 102.997,107.315 103.505,107.315 104.013,107.315 104.521,107.315 105.029,107.315 105.537,107.315 106.045,107.315 106.553,107.315 107.061,107.315 107.569,107.315 108.077,107.315 108.585,107.315 98.425,107.823 98.933,107.823 99.441,107.823 99.949,107.823 100.457,107.823 100.965,107.823 101.473,107.823 101.981,107.823 102.489,107.823 102.997,107.823 103.505,107.823 104.013,107.823 104.521,107.823 105.029,107.823 105.537,107.823 106.045,107.823 106.553,107.823 107.061,107.823 107.569,107.823 108.077,107.823 108.585,107.823
CELL1: D9.3 pad.0@135.934,77.343 Q8.6 Q10.1 Q11.2 R17.2 R22.1 | length 58.8
  Top Layer w0.254: Q11.2@109.583,50.815 110.251,50.815 v1(110.363,50.927) 110.7,50.59 R22.1@111.125,50.59 ; v1(113.665,50.927) 113.665,52.832 119.761,58.928 D9.3@121.938,58.928 ; 132.443,80.409 Q10.1@132.443,82.281 133.081,82.281 133.306,82.506 R17.2@133.731,82.506
  Bottom Layer w0.254: v1(110.363,50.927) 114.173,50.927 119.38,56.134 128.651,56.134 133.604,61.087 v1(133.604,74.803)
CELL2: D7.3 pad.0@92.434,52.228 Q7.6 Q11.1 Q14.2 R22.2 R27.1 | length 50.7
  Top Layer w0.254: v1(88.055,67.481) R27.1@88.055,68.072 88.055,68.751 88.28,68.976 Q14.2@88.28,69.741 ; 102.235,47.752 109.22,47.752 109.583,48.115 Q11.1@109.583,49.515 110.348,49.515 110.573,49.74 R22.2@111.125,49.74 ; v1(114.046,58.547) 116.332,58.547 119.253,61.468 D7.3@121.938,61.468
  Signal Layer 1 w0.254: v1(88.055,67.481) 88.055,56.598 v1(89.789,54.864)
  Bottom Layer w0.254: v1(108.458,47.752) 108.458,51.435 109.728,52.705 109.728,58.039 110.236,58.547 v1(114.046,58.547)
CELL3: D1.1 Q13.5 R28.1 R29.1 R30.2 R36.1 | length 28.1
  Top Layer w0.254: R36.1@82.975,68.072 v1(83.693,68.072) ; v1(89.535,69.596) 90.297,69.596 R29.1@91.186,68.707 ; 93.853,75.311 96.901,75.311 98.171,74.041 98.171,62.865 98.425,62.611 R30.2@99.905,62.611 ; D1.1@97.028,69.547 98.093,69.547
  Bottom Layer w0.254: v1(83.693,68.072) 86.614,68.072 88.138,69.596 v1(89.535,69.596)
CHG: D10.1 Q17.1 R15.1 U1.11 | length 23
  Top Layer w0.254: U1.11@109.63,67.553 108.342,67.553 108.077,67.818 108.077,69.85 108.331,70.104 112.014,70.104 112.185,70.275 R15.1@112.185,70.993 112.185,71.545 112.649,72.009 115.809,72.009 117.983,69.835 Q17.1@123.299,69.835 123.937,69.835 124.169,70.067 D10.1@124.714,70.067
CHG-: pad.7 Q6.1 Q6.2 Q6.3 Q17.3 R9.2 R15.2 R41.2 | length 18.2
  Top Layer w0.254: R15.2@111.335,70.993 111.335,73.108 112.141,73.914 113.538,73.914 ; R9.2@114.471,67.056 v1(115.062,67.056) ; Q17.3@121.049,70.485 121.049,72.753 ; 122.301,73.914 R41.2@123.908,73.914
  Signal Layer 1 w0.254: v1(115.062,67.056) 116.713,67.056 119.634,69.977 v1(119.634,73.279)
CHGG: D10.2 Q6.4 Q17.2 R41.1 | length 6.8
  Top Layer w0.254: Q17.2@123.299,71.135 123.299,72.118 123.608,72.427 D10.2@124.714,72.427 124.714,73.152 124.758,73.196 R41.1@124.758,73.914 124.758,75.013 124.272,75.499 Q6.4@123.317,75.499
COIN: R33.1 U1.3 | length 6.3
  Top Layer w0.254: R33.1@105.835,59.436 105.835,61.639 106.549,62.353 U1.3@109.63,62.353
DISG: Q1.4 Q2.4 Q3.4 Q4.4 Q5.4 Q16.4 R10.2 | length 60.8
  Top Layer w0.254: Q16.4@86.36,93.411 v1(86.36,94.234) ; Q2.4@92.456,93.411 v1(92.456,94.234) ; Q5.4@104.648,93.411 v1(104.648,94.234) ; Q4.4@110.744,93.411 v1(110.744,94.234) ; R10.2@114.471,68.199 v1(114.471,68.663) ; Q3.4@116.84,93.411 v1(116.84,94.361)
  Signal Layer 1 w0.254: v1(86.36,94.234) v1(92.456,94.234) v1(104.648,94.234) v1(110.744,94.234) v1@116.713,94.234 ; v1(114.471,68.663) 114.808,69 114.808,94.234
  other v1: 98.552,94.107
DO: R10.1 U1.12 | length 4
  Top Layer w0.254: U1.12@109.63,68.203 R10.1@113.617,68.203
DOIN: R32.1 U1.2 | length 4.3
  Top Layer w0.254: R32.1@107.398,59.436 107.398,61.297 107.804,61.703 U1.2@109.63,61.703
ISEN_N: Q1.1 Q1.2 Q1.3 Q2.1 Q2.2 Q2.3 Q3.1 Q3.2 Q3.3 Q4.1 Q4.2 Q4.3 Q5.1 Q5.2 Q5.3 Q16.1 Q16.2 Q16.3 R1.1 R2.1 R3.1 R4.1 R5.1 R6.1 R7.1 R8.2 R11.1 R12.1 R40.1 | length 45.1
  Top Layer w0.254: R8.2@114.471,69.596 v1(115.57,69.596)
  Signal Layer 1 w0.254: 107.188,99.06 107.188,99.949 107.442,100.203 116.078,100.203 117.094,99.187 117.094,95.758 117.602,95.25 117.602,93.98 117.221,93.599 116.022,93.599 115.57,93.147 115.57,84.836 116.84,83.566 116.84,70.358 116.078,69.596 v1(115.57,69.596)
  other v1: 88.265,93.091 89.535,93.091 94.361,93.091 95.631,93.091 100.457,93.091 101.727,93.091 106.553,93.091 107.823,93.091 112.649,93.091 113.919,93.091 88.265,93.599 89.535,93.599 94.361,93.599 95.631,93.599 100.457,93.599 101.727,93.599 106.553,93.599 107.823,93.599 112.649,93.599 113.919,93.599 88.265,94.869 89.535,94.869 90.551,94.869 91.059,94.869 91.567,94.869 93.091,94.869 94.361,94.869 95.631,94.869 96.647,94.869 97.155,94.869 97.663,94.869 99.314,94.869 99.822,94.869 100.838,94.869 101.854,94.869 102.87,94.869 103.378,94.869 103.886,94.869 105.156,94.869 106.172,94.869 107.188,94.869 108.458,94.869 109.093,94.869 109.728,94.869 111.379,94.869 112.522,94.869 113.792,94.869 115.062,94.869 88.265,95.377 89.535,95.377 90.551,95.377 91.059,95.377 91.567,95.377 92.075,95.377 92.583,95.377 93.091,95.377 94.361,95.377 95.631,95.377 96.647,95.377 97.155,95.377 97.663,95.377 98.171,95.377 98.679,95.377 99.314,95.377 99.822,95.377 100.838,95.377 101.854,95.377 102.87,95.377 103.378,95.377 103.886,95.377 105.156,95.377 106.172,95.377 107.188,95.377 108.458,95.377 109.093,95.377 109.728,95.377 112.522,95.377 113.792,95.377 115.062,95.377 88.265,95.885 89.535,95.885 90.551,95.885 91.059,95.885 91.567,95.885 92.075,95.885 92.583,95.885 93.091,95.885 94.361,95.885 95.631,95.885 96.647,95.885 97.155,95.885 97.663,95.885 98.171,95.885 98.679,95.885 99.314,95.885 99.822,95.885 100.838,95.885 101.854,95.885 102.87,95.885 103.378,95.885 103.886,95.885 105.156,95.885 106.172,95.885 107.188,95.885 108.458,95.885 109.093,95.885 109.728,95.885 112.522,95.885 113.792,95.885 115.062,95.885 98.552,98.298 99.06,98.298 99.695,98.298 100.457,98.298 100.965,98.298 101.727,98.298 102.235,98.298 103.378,98.298 103.886,98.298 104.775,98.298 105.537,98.298 106.045,98.298 106.934,98.298 107.696,98.298 108.204,98.298 109.474,98.298 109.982,98.298 110.49,98.298 111.506,98.298 112.014,98.298 112.522,98.298 113.538,98.298 114.046,98.298 114.554,98.298 98.552,98.806 99.06,98.806 99.695,98.806 100.457,98.806 100.965,98.806 101.727,98.806 102.235,98.806 103.378,98.806 103.886,98.806 104.775,98.806 105.537,98.806 106.045,98.806 106.934,98.806 107.696,98.806 108.204,98.806 109.474,98.806 109.982,98.806 110.49,98.806 111.506,98.806 112.014,98.806 112.522,98.806 113.538,98.806 114.046,98.806 114.554,98.806
NetD1_2: D1.2 R31.2 | length 4.4
  Top Layer w0.254: R31.2@97.028,62.147 D1.2@97.028,66.597
NetD2_A: D2.A R34.2 | length 7
  Top Layer w0.254: R34.2@82.125,63.5 82.125,61.766 83.276,60.615 D2.A@83.276,56.932
NetD3_A: D3.A R35.2 | length 5.8
  Top Layer w0.254: D3.A@79.441,62.099 79.752,62.099 80.391,62.738 80.391,65.405 80.772,65.786 R35.2@82.125,65.786
NetD4_A: D4.A R36.2 | length 5.7
  Top Layer w0.254: D4.A@76.891,68.008 77.152,68.008 77.724,68.58 79.502,68.58 80.01,68.072 R36.2@82.125,68.072
NetD5_A: D5.A R37.2 | length 11.6
  Top Layer w0.254: R37.2@127.044,61.595 129.286,61.595 131.318,63.627 131.318,65.151 131.826,65.659 133.731,65.659 134.582,64.808 D5.A@135.754,64.808
NetD6_A: D6.A D9.2 | length 9
  Top Layer w0.254: D9.2@124.188,59.578 124.218,59.548 130.922,59.548 131.12,59.746 133.092,59.746 D6.A@133.092,59.785
NetD6_K: D6.K R38.1 | length 7.8
  Top Layer w0.254: R38.1@127.044,60.198 129.54,60.198 131.191,61.849 133.132,61.849 D6.K@133.862,61.119
NetD7_1: D7.1 R38.2 | length 2.3
  Top Layer w0.254: D7.1@124.188,60.818 124.856,60.818 125.476,60.198 R38.2@126.194,60.198
NetD7_2: D7.2 R37.1 | length 2.2
  Top Layer w0.254: D7.2@124.188,62.118 125.08,62.118 125.603,61.595 R37.1@126.194,61.595
NetD8_K: D8.K R39.1 | length 5
  Top Layer w0.254: R39.1@127.044,58.801 129.286,58.801 129.667,58.42 129.667,57.35 D8.K@130.465,56.551
NetD9_1: D9.1 R39.2 | length 2.2
  Top Layer w0.254: D9.1@124.188,58.278 124.826,58.278 125.349,58.801 R39.2@126.194,58.801
NetQ7_1: Q7.1 Q7.3 R21.2
NetQ7_2: Q7.2 Q7.4 Q11.3 R21.1 | length 6.4
  Top Layer w0.254: Q7.2@103.475,49.713 v1(103.83,49.713) ; Q7.4@103.475,51.013 v1(104.394,51.013) 106.975,51.013 107.333,50.655 Q11.3@107.333,50.165
  Bottom Layer w0.254: v1(103.83,49.713) 104.394,50.277 v1(104.394,51.013)
NetQ8_1: Q8.1 Q8.3 R16.2
NetQ8_2: Q8.2 Q8.4 Q10.3 R16.1 | length 10.2
  Top Layer w0.254: R16.1@126.492,79.458 v1(127.21,79.458) 127.452,79.7 Q8.2@128.046,79.7 ; v1(128.046,77.881) Q8.4@128.046,78.4 ; v1@130.193,82.441 Q10.3@130.193,82.931
  Bottom Layer w0.254: v1(128.046,77.881) 128.046,79.091 127.679,79.458 v1(127.21,79.458) 127.21,81.49 128.143,82.423 v1(130.175,82.423)
NetQ13_1: Q13.1 Q13.3 R26.2
NetQ13_2: Q13.2 Q13.4 Q14.3 R26.1 | length 10.2
  Top Layer w0.254: Q14.3@87.63,71.991 87.63,74.041 88.011,74.422 89.916,74.422 90.592,75.098 v1(90.592,75.987) Q13.4@91.089,75.987 ; R26.1@89.154,77.045 89.999,77.045 90.241,77.287 v1(90.607,77.287) Q13.2@91.089,77.287
  Bottom Layer w0.254: v1(90.592,75.987) v1@90.592,77.272
NTC: R13.1 U1.8 | length 4.5
  Top Layer w0.254: U1.8@109.63,65.603 111.562,65.603 112.395,64.77 R13.1@113.621,64.77 R13.1@113.494,64.643